# EAGLE board switch (EAGLE 9.6.2)

Size 109 x 96 mm. Coordinates in mm from the lower left corner, seen from the top.
Outline: 0,3.5 0,92.5 arc-90 3.5,96 80.5,96 arc-90 82,94.5 82,88.25 arc90 83,87.25 91,87.25 arc90 92,88.25 92,95 arc-90 93,96 arc-90 94,95 94,81.5 arc90 95.5,80 107.5,80 arc-90 109,78.5 109,72.5 arc-90 107.5,71 95.5,71 arc90 94,69.5 94,58.5 arc-90 90.5,55 78,55 arc90 76,53 76,3.5 arc-90 72.5,0 3.5,0 arc-90 0,3.5
Copper layers (1+2*15+16): Top 0.035559375mm / dielectric 0.47751875mm / pwr 0.035559375mm / dielectric 0.47751875mm / gnd 0.035559375mm / dielectric 0.47751875mm / Bottom 0.035559375mm
Design rules "SparkFun-4-Layer-General-JLCPCB *": minimum track width 6mil, minimum drill 12mil, track to track 6mil, track to pad 6mil, pad to pad 6mil, via to via 6mil, smd to smd 6mil, copper to edge 6mil, drill to drill 6mil, minimum pad ring 7mil, minimum via ring 7mil, stop-mask expansion 3mil, vias tented up to drill 25mil, thermal gap 10mil

## Footprints (pad centres in the part's own frame; a part is rotated, then mirrored left to right if it is on the bottom)
M2_SCREW_FOOT = hole 2.2: 0,0

## Placement (x,y rotation side)
U$1  SW_OPENM  [SW_OPENING]  10,10 0 top
U$2  SW_OPENM  [SW_OPENING]  29,10 0 top
U$3  SW_OPENM  [SW_OPENING]  48,10 0 top
U$4  SW_OPENM  [SW_OPENING]  67,10 0 top
U$5  SW_OPENM  [SW_OPENING]  10,29 0 top
U$6  SW_OPENM  [SW_OPENING]  29,29 0 top
U$7  SW_OPENM  [SW_OPENING]  48,29 0 top
U$8  M2_SCREW_DEV  [M2_SCREW_FOOT]  38.5,57.5 0 top
U$9  M2_SCREW_DEV  [M2_SCREW_FOOT]  57.5,76.5 0 top
U$10  SW_OPENM  [SW_OPENING]  67,29 0 top
U$11  SW_OPENM  [SW_OPENING]  10,48 0 top
U$12  M2_SCREW_DEV  [M2_SCREW_FOOT]  38.5,38.5 0 top
U$13  M2_SCREW_DEV  [M2_SCREW_FOOT]  57.5,19.5 0 top
U$14  M2_SCREW_DEV  [M2_SCREW_FOOT]  19.5,76.5 0 top
U$15  SW_OPENM  [SW_OPENING]  29,48 0 top
U$16  SW_OPENM  [SW_OPENING]  48,48 0 top
U$18  SW_OPENM  [SW_OPENING]  67,48 0 top
U$19  SW_OPENM  [SW_OPENING]  10,67 0 top
U$20  SW_OPENM  [SW_OPENING]  10,86 0 top
U$21  SW_OPENM  [SW_OPENING]  29,67 0 top
U$22  M2_SCREW_DEV  [M2_SCREW_FOOT]  19.5,19.5 0 top
U$23  SW_OPENM  [SW_OPENING]  48,67 0 top
U$24  SW_OPENM  [SW_OPENING]  67,67 0 top
U$25  SW_OPENM  [SW_OPENING]  29,86 0 top
U$26  SW_OPENM  [SW_OPENING]  48,86 0 top
U$27  SW_OPENM  [SW_OPENING]  67,86 0 top

## Library data of the parts
U$1-U$16 U$18-U$27 = duckypad

## Text on the board
tDocu: big round corner 3.5mm